# Altium PCB CTR-Charging-Base-Rev-B.PcbDoc
Units mil, origin at the board's own origin, x right, y up, seen from the top; angles counter-clockwise.
Board outline 3956.69 x 4568.8 mil, 4 copper layers (Top Layer, Signal 1, Signal 2, Bottom Layer), stack 34.8 mil thick; 8 components, 2 nets, 19 pads, 0 vias.
Unrouted connection lines stored in the file: 2.
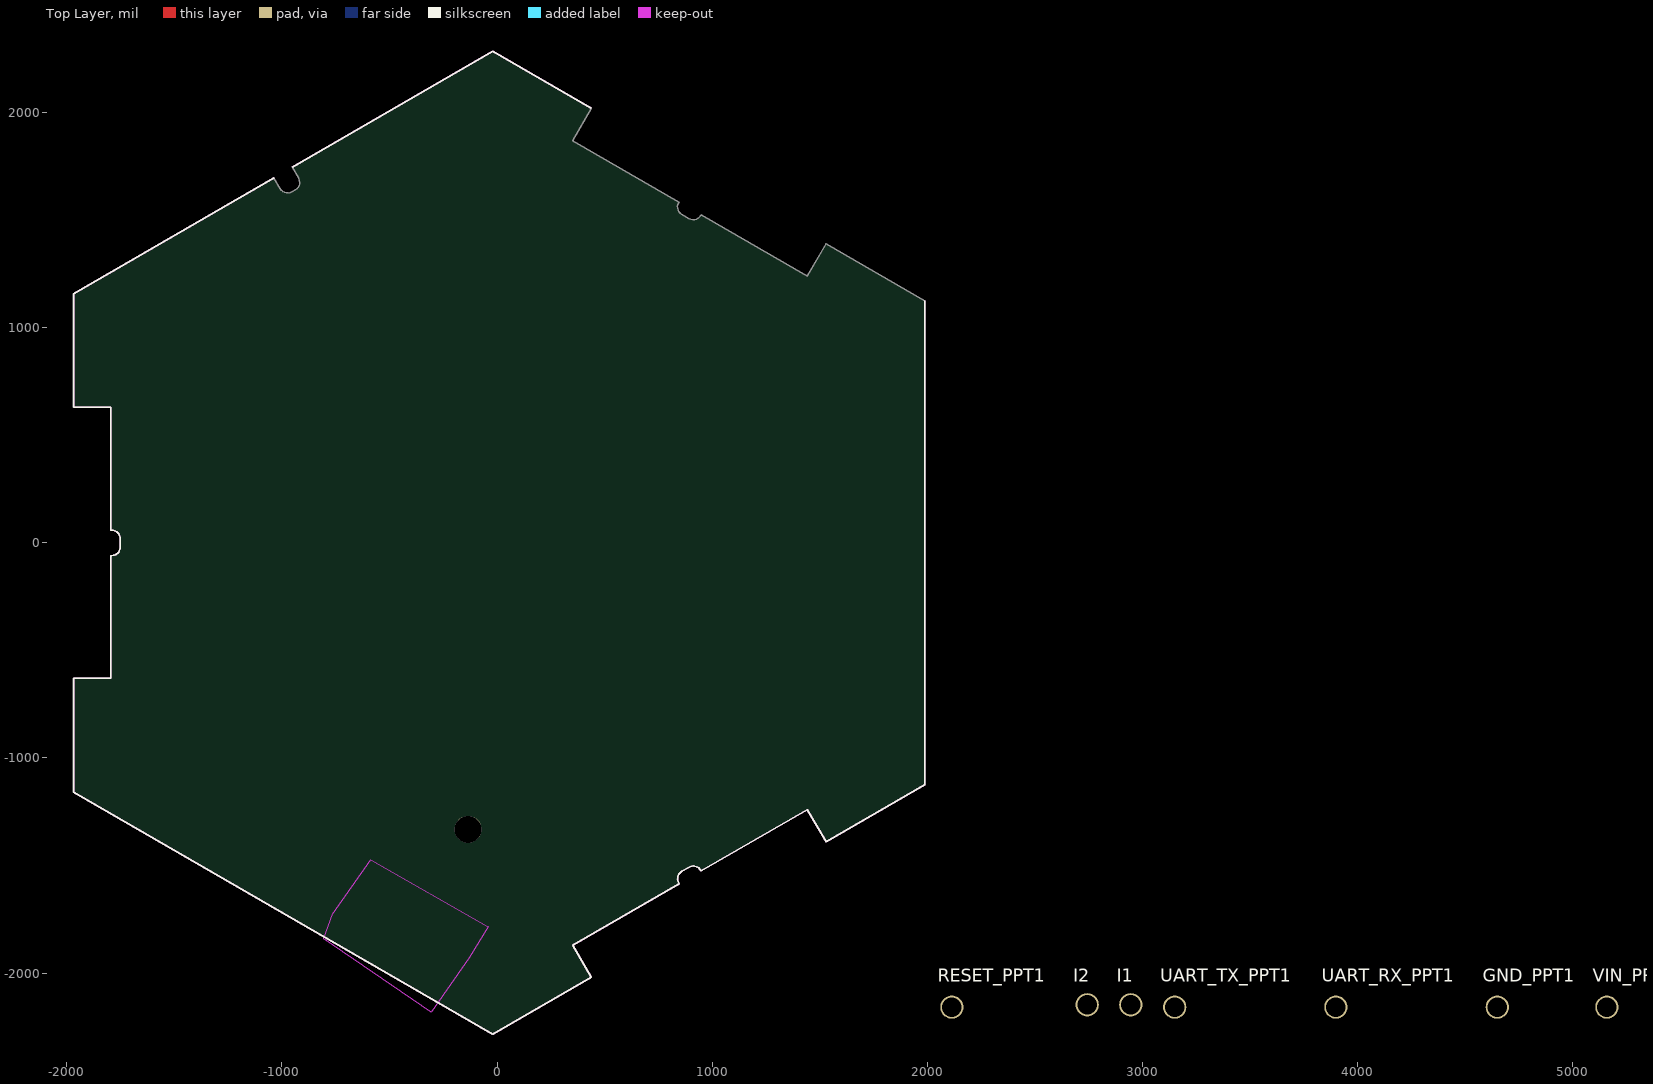
[diagram p0: Top Layer view]
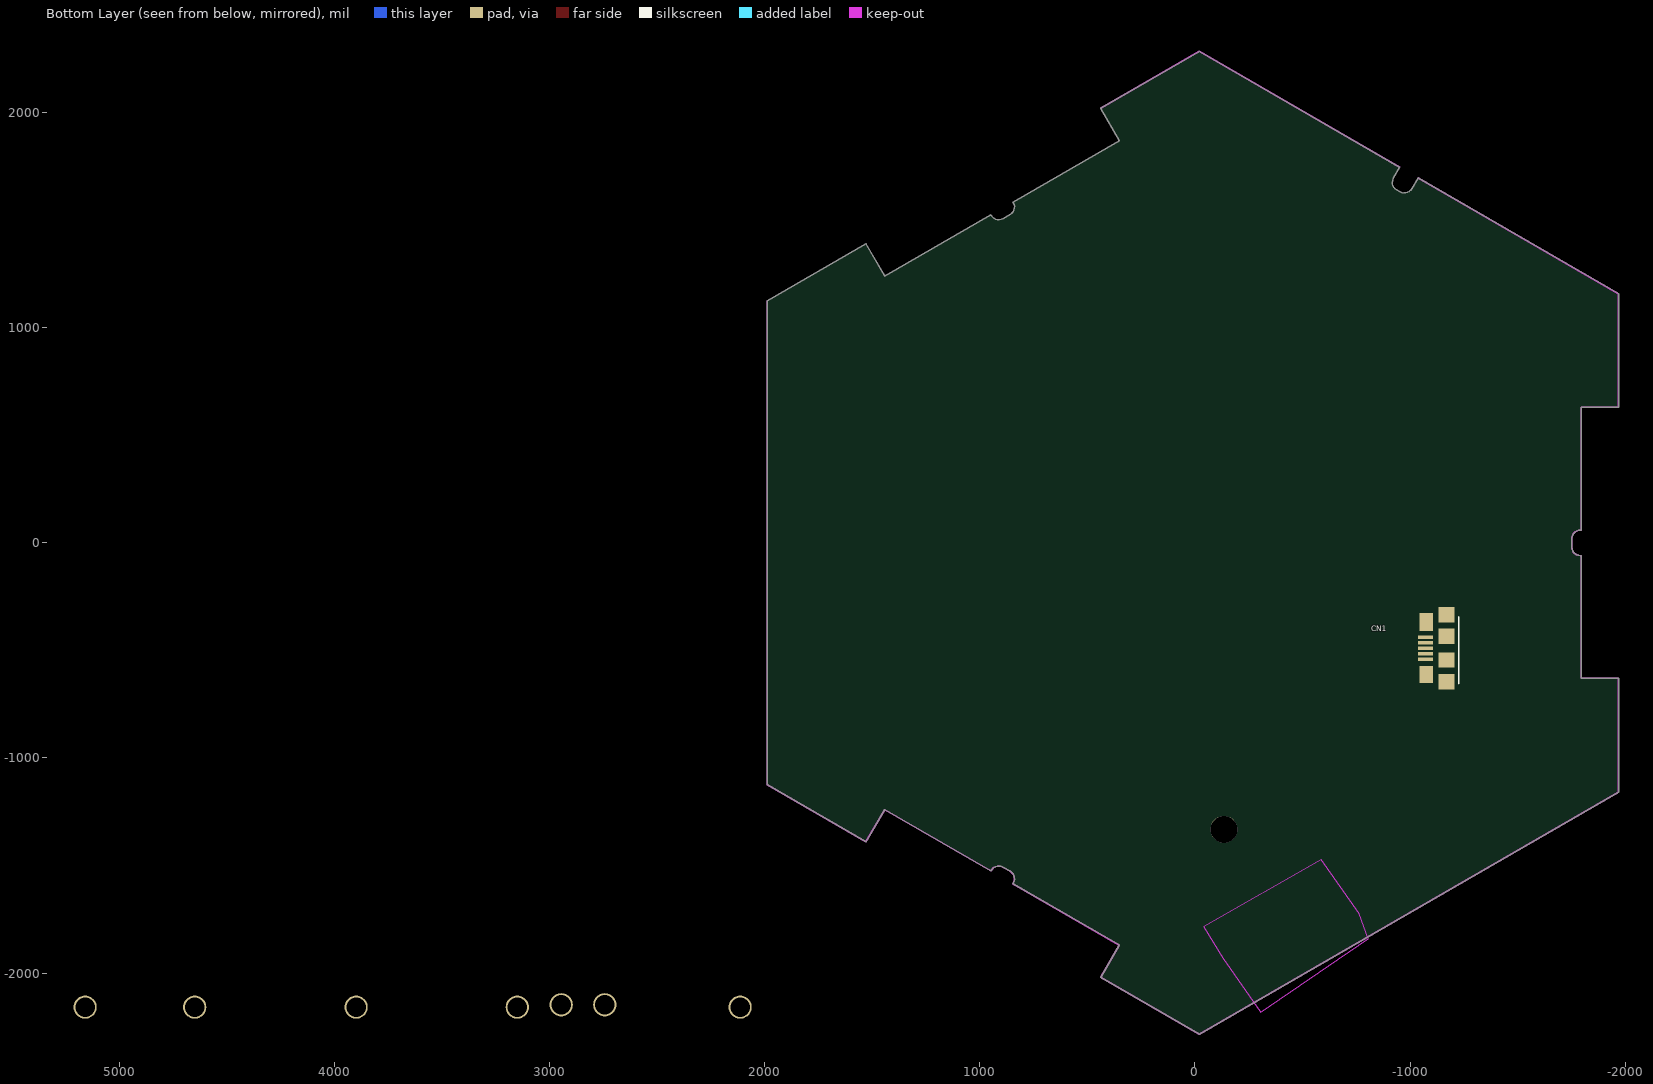
[diagram p1: Bottom Layer view, seen from below]

## Layer stack, top to bottom
Top Solder: solder mask 0.4, Solder Resist, Dk 3.5
Top Layer: signal copper 1.4
Dielectric1: prepreg 4.1, Dk 4.2
Signal 1: signal copper 1.4
Dielectric 2: core 21, Dk 4.2
Signal 2: signal copper 1.4
Dielectric 3: prepreg 4.1, Dk 4.2
Bottom Layer: signal copper 1.4
Bottom Solder: solder mask 0.4, Solder Resist, Dk 3.5

## Board outline
-1969.29,-629.92 -1796.06,-629.92 -1796.06,-59.06 -1792.13,-59.06 -1783.37,-58.07 -1775.04,-55.16 -1767.58,-50.47 -1761.35,-44.23 -1756.65,-36.77 -1753.74,-28.45 -1752.76,-19.68 -1752.76,19.68 -1753.74,28.45 -1756.65,36.77 -1761.35,44.23 -1767.58,50.47 -1775.04,55.16 -1783.37,58.07 -1792.13,59.06 -1796.06,59.06 -1796.06,629.92 -1969.29,629.92 -1969.29,1159.25 -1037.5,1697.22 -1007.97,1646.07 -1002.74,1638.98 -996.06,1633.23 -988.26,1629.11 -979.75,1626.83 -970.94,1626.5 -962.27,1628.14 -954.19,1631.66 -937.15,1641.5 -930.49,1646.34 -924.98,1652.46 -920.86,1659.59 -918.32,1667.41 -917.46,1675.6 -918.8,1685.79 -922.74,1695.29 -952.26,1746.43 -20.47,2284.4 437.94,2019.74 351.32,1869.71 845.71,1584.28 843.74,1580.87 840.21,1572.79 838.57,1564.13 838.9,1555.32 841.19,1546.8 845.31,1539.01 851.06,1532.33 858.15,1527.09 892.24,1507.41 900.33,1503.88 908.99,1502.24 917.8,1502.57 926.31,1504.85 934.11,1508.97 940.79,1514.72 946.03,1521.82 947.99,1525.23 1442.38,1239.79 1528.99,1389.81 1987.4,1125.15 1987.4,-1125.15 1528.99,-1389.81 1442.38,-1239.79 947.99,-1525.23 946.03,-1521.82 940.79,-1514.72 934.11,-1508.97 926.31,-1504.85 917.8,-1502.57 908.99,-1502.24 900.33,-1503.88 892.24,-1507.41 858.15,-1527.09 851.06,-1532.33 845.31,-1539.01 841.19,-1546.8 838.9,-1555.32 838.57,-1564.13 840.21,-1572.79 843.74,-1580.87 845.71,-1584.28 351.32,-1869.71 437.94,-2019.74 -20.47,-2284.4 -1969.29,-1159.25

## Design rules (kind name [scope] priority, off if disabled: settings)
Clearance [All] p1: gap=6
ComponentClearance ComponentClearance_BAT [InComponent('BT1') vs InComponent('CN3')] p1: gap=0 collisioncheckmode=3 verticalgap=0 showdistances=FALSE
ComponentClearance [All] p2: gap=7 collisioncheckmode=3 verticalgap=7 showdistances=FALSE
HoleSize [All] p1: absolutevalues=TRUE maxlimit=300 minlimit=10 maxpercent=80.000 minpercent=20.000
HoleToHoleClearance [All] p1: gap=7 allowstackedmicrovias=TRUE
MinimumSolderMaskSliver [InNet('VIN')] p1: minsoldermaskwidth=0.5
NetAntennae NetAntennae_ANT [InNetClass('ANT')] p1: netantennaetolerance=0
NetAntennae [All] p2: netantennaetolerance=0
PolygonConnect [All] p1: connectstyle=Relief reliefconductorwidth=10 reliefentries=4 polygonreliefangle="90 Angle" airgapwidth=10
RoutingVias [All] p1: holewidth=20 width=34 viastyle="Through Hole" minholewidth=10 minwidth=22 maxholewidth=35 maxwidth=50
SMDNeckDown [All] p1: percent=120.000
SilkToBoardRegionClearance [InNet('3.3V')] p1:
SilkToSilkClearance [All] p1: silktosilkclearance=0
SilkToSolderMaskClearance [IsPad] p1: minsilkscreentomaskgap=0 clearancetoexposedcopper=TRUE
SolderMaskExpansion [All] p1: expansion=4
Width Width_BT [InNetClass('BT')] p1: maxlimit=40 minlimit=10 preferedwidth=15
Width Width_VDD [InNet('3.3V')] p2: maxlimit=20 minlimit=7 preferedwidth=10
Width [All] p3: maxlimit=30 minlimit=6 preferedwidth=7
22 further rules are at their usual default settings.

## Components (designator, comment, footprint, x,y, rotation, side; value= is the part's Value field where it differs from the comment)
CN1 "10118192" USB-MICRO-B -1170.08,-489.76 r0 bottom
GND_PPT1 "Pogo Pin Target" POGO_PIN 4649.59,-2158.27 r90 top
I1 "Pogo Pin Target" POGO_PIN 2946.05,-2147.25 r0 top
I2 "Pogo Pin Target" POGO_PIN 2743.3,-2147.25 r0 top
RESET_PPT1 "Pogo Pin Target" POGO_PIN 2114.16,-2158.27 r90 top
UART_RX_PPT1 "Pogo Pin Target" POGO_PIN 3899.59,-2158.27 r90 top
UART_TX_PPT1 "Pogo Pin Target" POGO_PIN 3149.99,-2158.27 r90 top
VIN_PPT1 "Pogo Pin Target" POGO_PIN 5159.43,-2158.27 r90 top

## Footprints (in the part's own frame and the unit in brackets; to place one, negate y for a bottom-side part, rotate by r counter-clockwise, add the part's x,y. Pads: shape width x height; smd on the part's side, far side on the other; paste and mask are expansions set on the pad)
POGO_PIN [mm] "Through-hole pogo pin"
  round 2.737 hole 2.3: 1(0,0)
  body extent -1.92,-1.94 1.96,1.94, height 5.59
USB-MICRO-B [mm] "Micro RA USB-B Connector"
  rect 1.9x1.8 smd: 0(0,-3.95) 0(0,-1.4) 0(0,1.4) 0(0,3.95)
  rect 1.6x2.1 smd: 0(2.4,-3.1)
  rect 1.6x2 smd: 0(2.4,3.1)
  rect 1.8x0.4 smd: 1(2.5,1.3) 2(2.5,0.65) 3(2.5,0) 4(2.5,-0.65) 5(2.5,-1.3)
  silkscreen extent -1.45,-3.7 -1.45,4.2, body extent -2.66,-3.96 3,3.96, height 2.73

## Part data
CN1: library part Micro-USB-B, "Micro-USB RA Type B"
GND_PPT1 I1 I2 RESET_PPT1 UART_RX_PPT1 UART_TX_PPT1 VIN_PPT1: library part 0850-0-15-20-83-14-11-0

## Free pads (board coordinates)
  round 125.98 hole 125.98: 1(-134.91,-1331.85)

## Nets (pads, with @x,y where several pads share a name; then routed paths per layer and width w, separated by ;. In a path a pad name is that pad's centre, name@x,y a point inside that pad or via, vN(x,y) a via of type N, cw(c..) or ccw(c..) an arc to the next point about the centre after c; other vN are vias at no path point)
GND: CN1.5 GND_PPT1.1
VIN_5V: CN1.1 VIN_PPT1.1
pads on no net: CN1.0 CN1.2 CN1.3 CN1.4 I1.1 I2.1 RESET_PPT1.1 UART_RX_PPT1.1 UART_TX_PPT1.1

## Keep-outs
Keep-Out Layer:
  pour cut-out: -805.12,-1839.76 -762.88,-1724.92 -586.61,-1473.23 -40.94,-1785.43 -130.51,-1929.33 -306.3,-2181.5
  lines w6: -1036.86,1697.22 -1968.65,1159.25 -1968.65,629.92 -1795.42,629.92 -1795.42,59.06 -1791.48,59.06 cw(c-1791.48,19.69) -1752.11,19.69 -1752.11,-19.68 cw(c-1791.48,-19.68) -1791.48,-59.05 -1795.42,-59.05 -1795.42,-629.92 -1968.65,-629.92 -1968.65,-1159.24 -19.83,-2284.4 438.58,-2019.73 351.97,-1869.71 846.35,-1584.28 844.38,-1580.87 cw(c878.48,-1561.19) 858.79,-1527.09 892.89,-1507.4 cw(c912.57,-1541.5) 946.67,-1521.82 948.64,-1525.22 1443.02,-1239.79 1529.64,-1389.81 1988.05,-1125.15 1988.05,1125.15 ; -951.62,1746.43 -19.83,2284.4 438.58,2019.74

## Silkscreen, mask and mechanical layers (free items; w line width, h text height)
Top Overlay:
  lines w6: -1036.86,1697.22 -1968.65,1159.25 -1968.65,629.92 -1795.42,629.92 -1795.42,59.06 -1791.48,59.06 cw(c-1791.48,19.69) -1752.11,19.69 -1752.11,-19.68 cw(c-1791.48,-19.68) -1791.48,-59.05 -1795.42,-59.05 -1795.42,-629.92 -1968.65,-629.92 -1968.65,-1159.24 -19.83,-2284.4 438.58,-2019.73 351.97,-1869.71 846.35,-1584.28 844.38,-1580.87 ; -951.62,1746.43 -19.83,2284.4 438.58,2019.74 ; 1988.05,1125.15 1988.05,-1125.15 1529.64,-1389.81 1443.02,-1239.79 948.64,-1525.22 946.67,-1521.82 ; 844.38,-1580.87 cw(c878.48,-1561.19) 858.79,-1527.09 ; 844.38,-1580.87 844.38,-1580.87 ; 858.79,-1527.09 892.89,-1507.4 cw(c912.57,-1541.5) 946.67,-1521.82 ; 858.79,-1527.09 858.79,-1527.09 ; 946.67,-1521.82 946.67,-1521.82
Mechanical 5:
  circle w2: c1655.61,-1135.32 r39.37
  circle w2: c155.41,-2001.46 r39.37
  circle w2: c-1811.02,866.14 r39.37
  circle w2: c-1811.02,-866.14 r39.37
  circle w2: c0,0 r1476.38
  lines w2: -1036.71,1697.22 -1968.5,1159.25 -1968.5,629.92 -1795.28,629.92 -1795.28,59.06 -1791.34,59.06 cw(c-1791.34,19.68) -1751.97,19.68 -1751.97,-19.69 cw(c-1791.34,-19.69) -1791.34,-59.06 -1795.28,-59.06 -1795.28,-629.92 -1968.5,-629.92 -1968.5,-1159.25 -19.68,-2284.4 438.72,-2019.74 352.11,-1869.71 846.49,-1584.28 844.53,-1580.87 cw(c878.62,-1561.19) 858.94,-1527.09 893.03,-1507.41 cw(c912.72,-1541.5) 946.81,-1521.82 948.78,-1525.23 1443.17,-1239.79 1529.78,-1389.81 1988.19,-1125.15 1988.19,1125.15 ; -951.48,1746.43 -19.68,2284.4 438.72,2019.73
Mechanical 14:
  circle w0.04: c0,0 r1590.56
  circle w0.04: c0,0 r1102.36